# EAGLE board dpMaster (EAGLE 7.5.0)
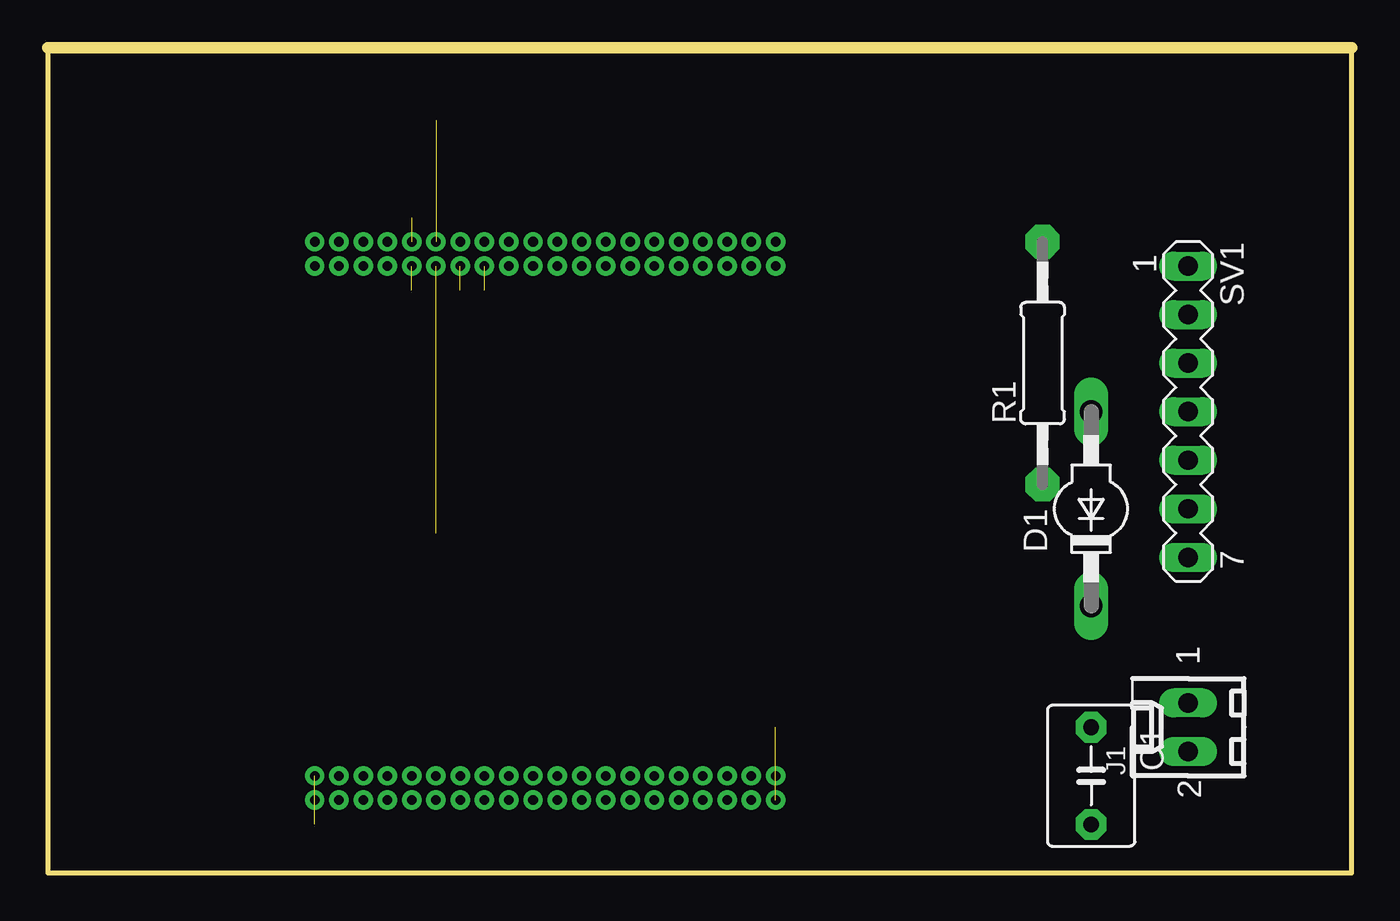
[diagram p0: board, top side]
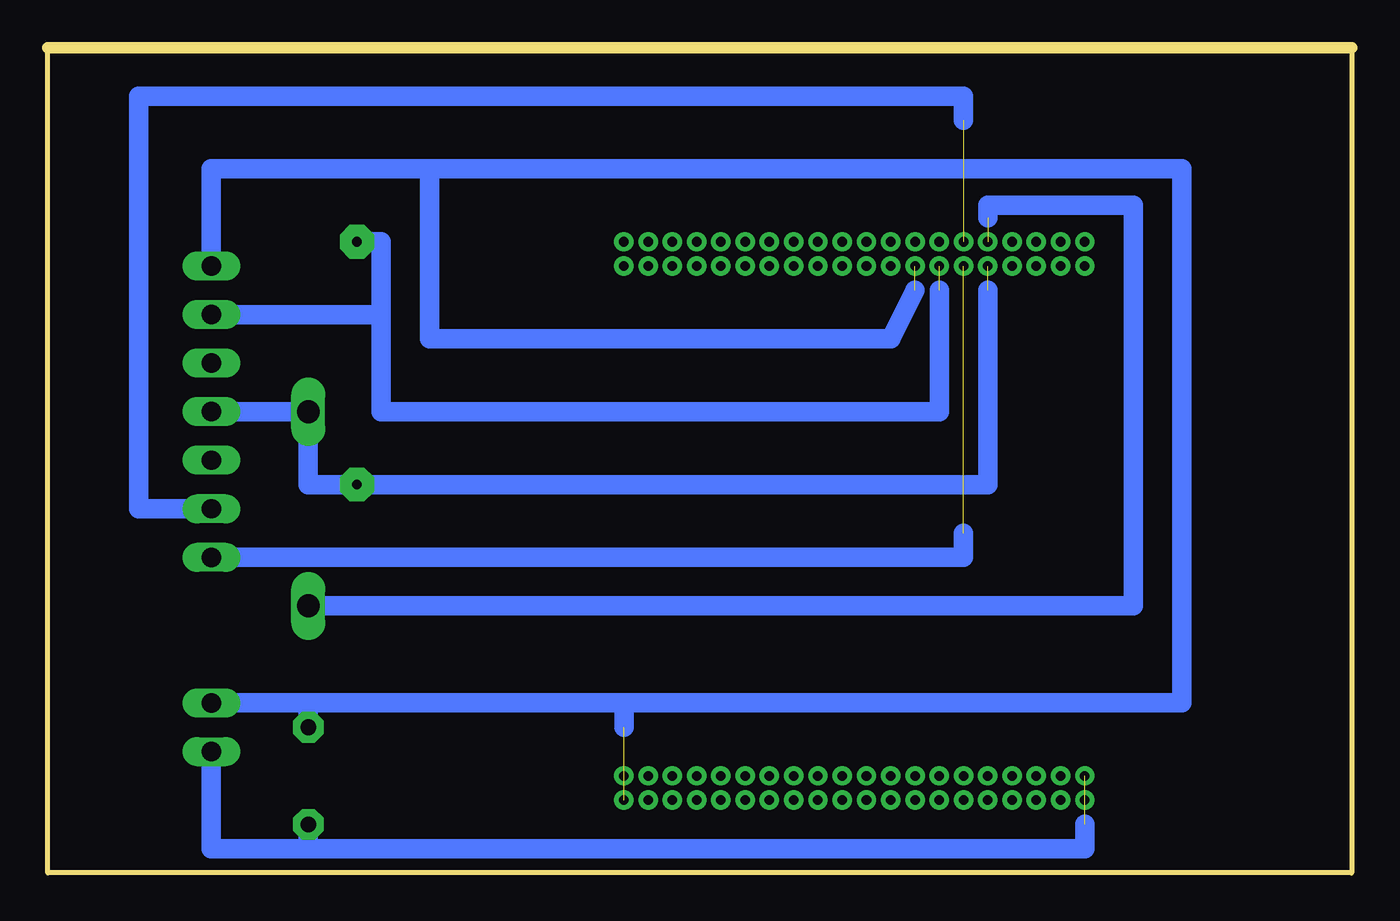
[diagram p1: board, bottom side, seen from below]

Size 68.25 x 43.17 mm. Coordinates in mm from the lower left corner, seen from the top.
Outline: 0,0 68.25,0 68.25,43.17 0,43.17 0,0
Copper layers (1*16): Top 0.035mm / dielectric 1.5mm / Bottom 0.035mm
Design rules "default": minimum track width 10mil, minimum drill 24mil, track to track 8mil, track to pad 8mil, pad to pad 8mil, via to via 8mil, smd to smd 8mil, copper to edge 40mil, drill to drill 8mil, minimum pad ring 10mil, minimum via ring 8mil, stop-mask expansion 4mil, vias tented up to drill 0mil, thermal gap 10mil

## Footprints (pad centres in the part's own frame; a part is rotated, then mirrored left to right if it is on the bottom)
C5B4.5 = drill 0.813 pad 1.6 octagon: 1 -2.54,0; 2 2.54,0
SOD57-10 = drill 1.194 long: A 5.08,0; C -5.08,0
6410-02 = drill 1.016 long: 1 1.27,0; 2 -1.27,0
0207/12 = drill 0.5 pad 1.778 octagon: 1 -6.35,0; 2 6.35,0
MA07-1 = drill 1.016 long: 1 -7.62,0; 2 -5.08,0; 3 -2.54,0; 4 0,0; 5 2.54,0; 6 5.08,0; 7 7.62,0
SFC-120-T2-L-D = drill 0.5 pad 1.016: P$1 0,-1.27; P$2 0,0; P$3 1.27,-1.27; P$4 1.27,0; P$5 2.54,-1.27; P$6 2.54,0; P$7 3.81,-1.27; P$8 3.81,0; P$9 5.08,-1.27; P$10 5.08,0; P$11 6.35,-1.27; P$12 6.35,0; P$13 7.62,-1.27; P$14 7.62,0; P$15 8.89,-1.27; P$16 8.89,0; P$17 10.16,-1.27; P$18 10.16,0; P$19 11.43,-1.27; P$20 11.43,0; P$21 12.7,-1.27; P$22 12.7,0; P$23 13.97,-1.27; P$24 13.97,0; P$25 15.24,-1.27; P$26 15.24,0; P$27 16.51,-1.27; P$28 16.51,0; P$29 17.78,-1.27; P$30 17.78,0; P$31 19.05,-1.27; P$32 19.05,0; P$33 20.32,-1.27; P$34 20.32,0; P$35 21.59,-1.27; P$36 21.59,0; P$37 22.86,-1.27; P$38 22.86,0; P$39 24.13,-1.27; P$40 24.13,0

## Placement (x,y rotation side)
C1  [C5B4.5]  54.61,5.08 270 top
D1  1N5061  [SOD57-10]  54.61,19.05 90 top
J1  22-27-2021-02  [6410-02]  59.69,7.62 90 top
R1  [0207/12]  52.07,26.67 90 top
SV1  [MA07-1]  59.69,24.13 270 top
U$1  SFC-120-T2-L-D  [SFC-120-T2-L-D]  13.97,33.02 0 top
U$2  SFC-120-T2-L-D  [SFC-120-T2-L-D]  13.97,5.08 0 top

## Library data of the parts
C1 = capacitor-wima
D1 = diode
J1 = con-molex; OC_FARNELL: unknown; OC_NEWARK: unknown
R1 = rcl
SV1 = con-lstb; OC_FARNELL: unknown; OC_NEWARK: unknown
U$1 U$2 = sfc-120-t2-l-d

## Nets
N$2: D1.C U$1.P$10
N$4: SV1.6 U$1.P$12
N$6: C1.2 J1.2 U$2.P$1 U$2.P$2
N$8: D1.A R1.1 SV1.4 U$1.P$9
N$9: SV1.7 U$1.P$11
N$12: R1.2 SV1.2 U$1.P$13
N$14: C1.1 J1.1 SV1.1 U$1.P$15 U$2.P$39 U$2.P$40

## Tracks (layer width: path | path; a pad name or v marks a point on that pad's centre or on a via)
N$2  (1 unrouted)
  Bottom 1.016: D1.C 11.43,13.97 11.43,34.92 19.05,34.92 19.05,34.29
N$4  (2 unrouted)
  Bottom 1.016: SV1.6 63.5,19.05 63.5,40.64 20.32,40.64 20.32,39.37
N$6  (2 unrouted)
  Bottom 1.016: J1.2 59.69,1.27 54.61,1.27 | 54.61,1.27 13.97,1.27 13.97,2.54 | C1.2 54.61,1.27
N$8  (1 unrouted)
  Bottom 1.016: SV1.4 D1.A 54.61,20.32 R1.1 19.05,20.32 19.05,30.48
N$9  (1 unrouted)
  Bottom 1.016: SV1.7 20.32,16.51 20.32,17.78
N$12  (1 unrouted)
  Bottom 1.016: SV1.2 50.8,29.21 50.8,24.13 | 50.8,24.13 21.59,24.13 21.59,30.48 | R1.2 50.8,33.02 50.8,24.13
N$14  (3 unrouted)
  Bottom 1.016: 48.26,36.83 48.26,27.94 24.13,27.94 22.86,30.48 | 48.26,36.83 59.69,36.83 SV1.1 | 38.1,8.89 8.89,8.89 8.89,36.83 48.26,36.83 | J1.1 54.61,8.89 | 54.61,8.89 38.1,8.89 | 38.1,8.89 38.1,7.62 | C1.1 54.61,8.89